# Altium PCB LCD_controller_hv2.PcbDoc
Units mm, origin at the board's own origin, x right, y up, seen from the top; angles counter-clockwise.
Board outline 172.5 x 79.9 mm, 2 copper layers (Top Layer, Bottom Layer); 40 components, 75 nets, 282 pads, 255 vias.
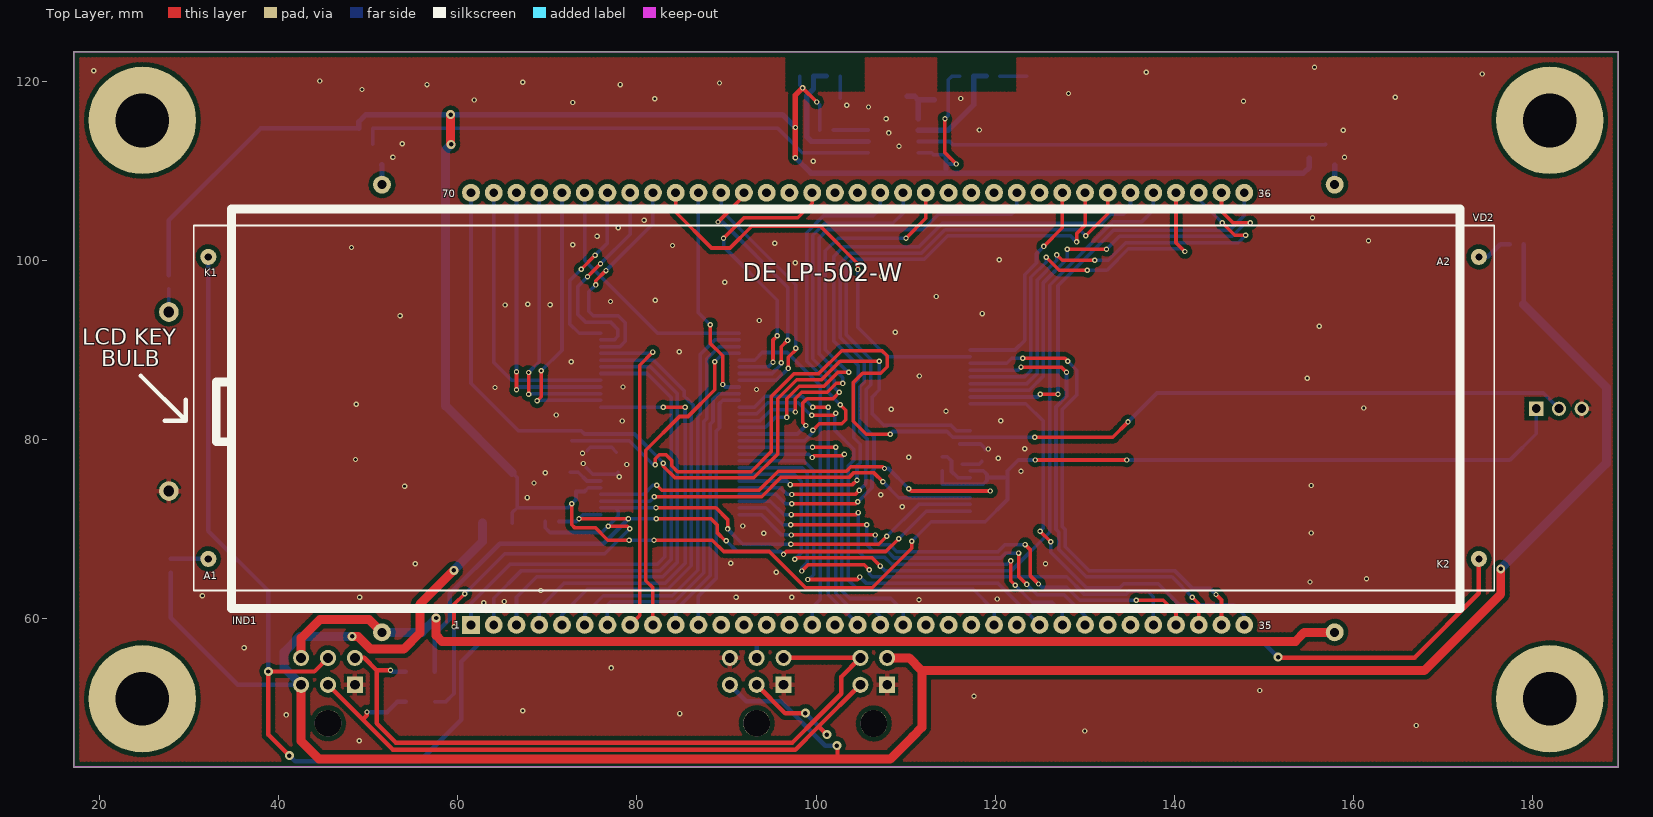
[diagram p0: Top Layer view]
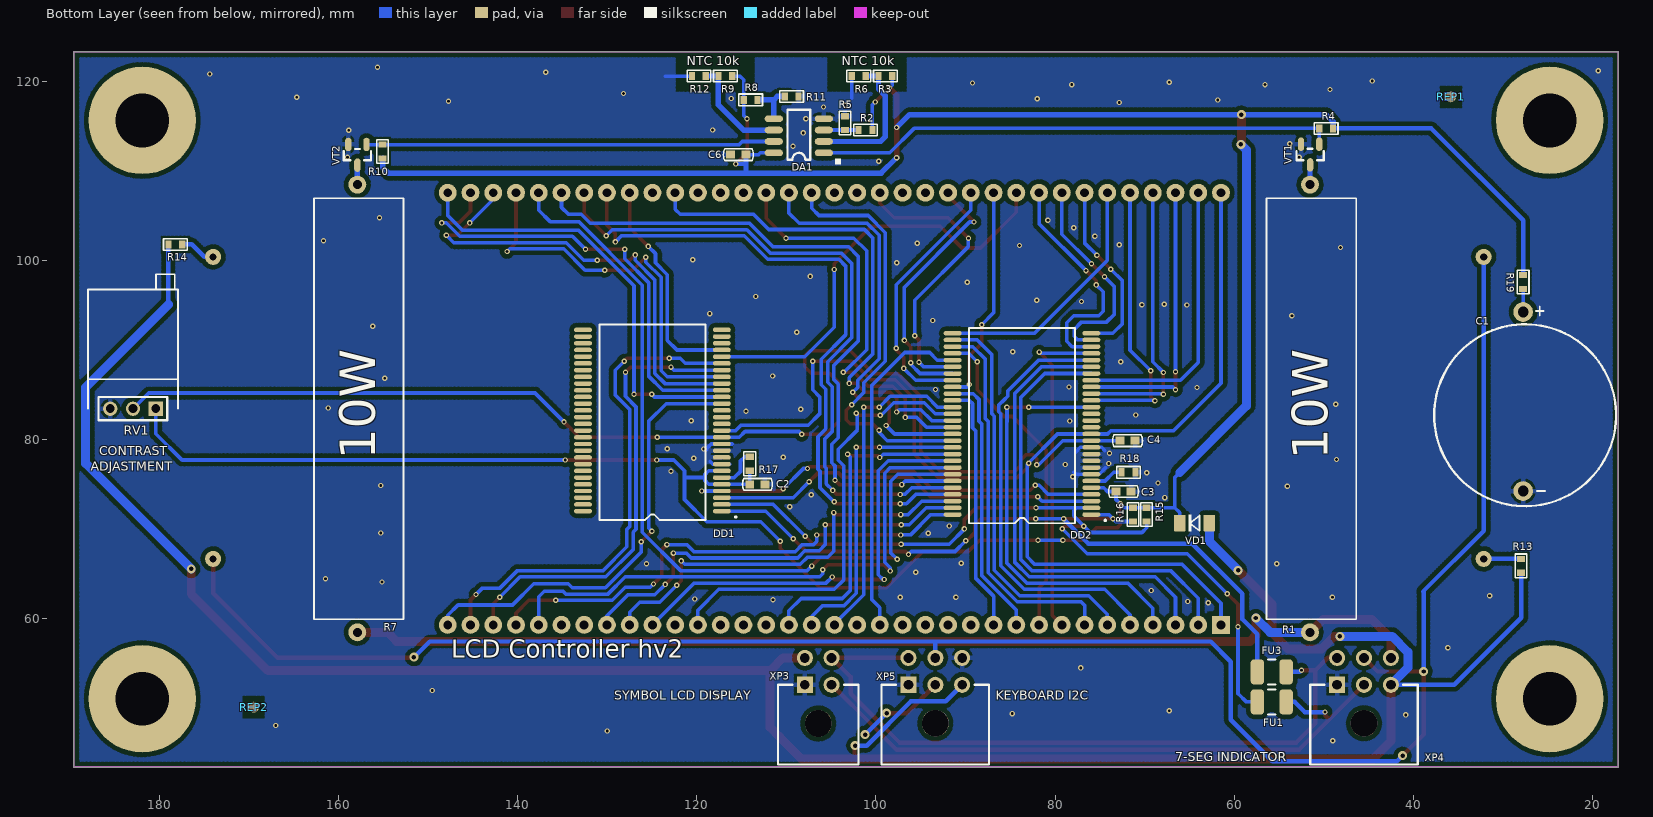
[diagram p1: Bottom Layer view, seen from below]

## Layer stack, top to bottom
Top Solder: solder mask 0.0102, Solder Resist, Dk 3.5
Top Layer: signal copper 0.0356
Dielectric 1: dielectric 0.32, FR-4, Dk 4.8
Bottom Layer: signal copper 0.0356
Bottom Solder: solder mask 0.0102, Solder Resist, Dk 3.5

## Board outline
17.1,43.419 189.6,43.419 189.6,123.319 17.1,123.319

## Design rules (kind name [scope] priority, off if disabled: settings)
Clearance Clearance_2 [InPolygon] p1: gap=0.5 ignorepadtopadclearanceinfootprint=FALSE
Clearance [All] p2: gap=0.2 ignorepadtopadclearanceinfootprint=FALSE
HoleSize [All] p1: absolutevalues=TRUE maxlimit=10 minlimit=0.025 maxpercent=80.000 minpercent=20.000
HoleToHoleClearance [All] p1: gap=0.2 allowstackedmicrovias=TRUE
MinimumSolderMaskSliver [All] p1: minsoldermaskwidth=0.05
PolygonConnect PolygonConnect_1 [IsVia] p1: connectstyle=Direct reliefconductorwidth=0.254 reliefentries=4 polygonreliefangle="90 Angle" airgapwidth=0.254
PolygonConnect PolygonConnect_2 [All] p2: connectstyle=Relief reliefconductorwidth=0.5 reliefentries=4 polygonreliefangle="90 Angle" airgapwidth=0.3
PolygonConnect [All] p3: connectstyle=Relief reliefconductorwidth=0.3 reliefentries=4 polygonreliefangle="90 Angle" airgapwidth=0.3
RoutingCorners [All] p1: cornerstyle=45-Degree minsetback=2 maxsetback=5
RoutingVias [All] p1: holewidth=0.4 width=0.8 viastyle="Through Hole" minholewidth=0.3 minwidth=0.6 maxholewidth=0.5 maxwidth=1
SilkToSilkClearance [All] p1: silktosilkclearance=0.1
SilkToSolderMaskClearance [IsPad] p1: minsilkscreentomaskgap=0.1 clearancetoexposedcopper=TRUE
SolderMaskExpansion [All] p1: expansion=0.102
Width [All] p1: maxlimit=5 minlimit=0.2 preferedwidth=0.4
24 further rules are at their usual default settings.

## Classes and differential pairs
component class Main: C2 C3 C4 DD1 DD2 R15 R16 R17 R18 REP1 REP2 RV1
component class LCD: IND1 R13 R14 VD2
component class Heater: C6 DA1 R1 R2 R3 R4 R5 R6 R7 R8 R9 R10 R11 R12 VT1 VT2
component class Connections: C1 FU1 FU3 R19 VD1 XP3 XP4 XP5

## Components (designator, comment, footprint, x,y, rotation, side; value= is the part's Value field where it differs from the comment)
C1 "EEC-S5R5H105" CR2032_ONBOARD 27.375,82.825 r180 bottom
C2 "0.1uF" CC0603 113.25,75 r180 bottom
C3 "0.1uF" CC0603 72.35,74.2 r180 bottom
C4 "0.1uF" CC0603 71.9,79.875 r180 bottom
C6 "0.1uF" CC0603 115.375,111.825 r0 bottom
DA1 "LM358D" SO-8 105.825,112.025 r90 bottom
DD1 "PCF8576C" SOT190-1 117.221,72.009 r0 bottom locked
DD2 "PCF8576C" SOT190-1 75.946,71.628 r0 bottom locked
FU1 "MICROSMD010F-2" RC1210 55.8,50.7 r0 bottom
FU3 "MICROSMD010F-2" RC1210 55.8,54.05 r0 bottom
IND1 "DE156" IND_DE156 61.468,59.309 r90 top locked
R1 "PRW 10W 47E" R_5W_Cement 51.525,108.475 r270 bottom
R2 "18k 1%" RC0603#1 101.175,114.575 r180 bottom
R3 "NCP18XH103J03RB" RC0603#1 98.95,120.6 r180 bottom
R4 "n.p" RC0603#1 49.725,114.75 r180 bottom
R5 "10k 1%" RC0603#1 103.475,115.35 r270 bottom
R6 "10k 1%" RC0603#1 101.925,120.6 r180 bottom
R7 "PRW 10W 47E" R_5W_Cement 157.925,108.475 r270 bottom
R8 "22k 1%" RC0603#1 114,117.95 r0 bottom
R9 "NCP18XH103J03RB" RC0603#1 116.825,120.6 r180 bottom
R10 "n.p" RC0603#1 155.1,112.175 r270 bottom
R11 "10k 1%" RC0603#1 109.425,118.325 r0 bottom
R12 "10k 1%" RC0603#1 119.775,120.6 r180 bottom
R13 "68E" RC0603#1 27.95,65.9 r90 bottom
R14 "68E" RC0603#1 178.25,101.8 r0 bottom
R15 "n.p" RC0603#1 69.775,71.625 r90 bottom
R16 "n.p" RC0603#1 71.3,71.625 r90 bottom
R17 "0E" RC0603#1 114.1,77.3 r90 bottom
R18 "0E" RC0603#1 71.8,76.35 r0 bottom
R19 "0E" RC0603#2 27.725,97.6 r270 bottom value=10E
REP1 "REPER_POINT_1.2" REPER1.2 35.8,118.275 r90 bottom
REP2 "REPER_POINT_1.2" REPER1.2 169.5,50.125 r90 bottom
RV1 "3296W-10K" PLS-03 180.44,83.45 r0 bottom
VD1 "LL4148" SOD-80 64.425,70.675 r180 bottom
VD2 "LP-502-W" LP-502-W 32.131,66.675 r0 top locked
VT1 "BC817-40" SOT-23(123) 50.5,113 r90 bottom
VT2 "BC817-40" SOT-23(123) 156.9,112.975 r90 bottom
XP3 "MIF2X02PRP" MIF2X02PRP 107.95,52.619 r270 bottom
XP4 "MIF2X03PRP" MIF2X03PRP#1 48.5,52.619 r270 bottom
XP5 "MIF2X03PRP" MIF2X03PRP#2 96.375,52.619 r270 bottom

## Footprints (in the part's own frame and the unit in brackets; to place one, negate y for a bottom-side part, rotate by r counter-clockwise, add the part's x,y. Pads: shape width x height; smd on the part's side, far side on the other; paste and mask are expansions set on the pad)
CC0603 [mm]
  rect 1x0.9 smd paste-25.4 mask+0.05: 1(-0.85,0) 2(0.85,0)
  silkscreen extent -1.66,-0.65 1.66,0.65
CR2032_ONBOARD [mm]
  round 2.2 hole 1.2 mask+0.05: 1(-0.35,-8.575) 2(-0.35,11.425)
  silkscreen extent -10.29,-10.26 10.03,12.03
IND_DE156 [mm]
  rect 2x2 hole 1 mask+0.05: 1(0,0)
  round 2 hole 1 mask+0.05: 2(0,-2.54) 3(0,-5.08) 4(0,-7.62) 5(0,-10.16) 6(0,-12.7) 7(0,-15.24) 8(0,-17.78) 9(0,-20.32) 10(0,-22.86) 11(0,-25.4) 12(0,-27.94) 13(0,-30.48) 14(0,-33.02) 15(0,-35.56) 16(0,-38.1) 17(0,-40.64) 18(0,-43.18) 19(0,-45.72) 20(0,-48.26) 21(0,-50.8) 22(0,-53.34) 23(0,-55.88) 24(0,-58.42) 25(0,-60.96) 26(0,-63.5) 27(0,-66.04) 28(0,-68.58) 29(0,-71.12) 30(0,-73.66) 31(0,-76.2) 32(0,-78.74) 33(0,-81.28) 34(0,-83.82) 35(0,-86.36) 36(48.26,-86.36) 37(48.26,-83.82) 38(48.26,-81.28) 39(48.26,-78.74) 40(48.26,-76.2) 41(48.26,-73.66) 42(48.26,-71.12) 43(48.26,-68.58) 44(48.26,-66.04) 45(48.26,-63.5) 46(48.26,-60.96) 47(48.26,-58.42) 48(48.26,-55.88) 49(48.26,-53.34) 50(48.26,-50.8) 51(48.26,-48.26) 52(48.26,-45.72) 53(48.26,-43.18) 54(48.26,-40.64) 55(48.26,-38.1) 56(48.26,-35.56) 57(48.26,-33.02) 58(48.26,-30.48) 59(48.26,-27.94) 60(48.26,-25.4) 61(48.26,-22.86) 62(48.26,-20.32) 63(48.26,-17.78) 64(48.26,-15.24) 65(48.26,-12.7) 66(48.26,-10.16) 67(48.26,-7.62) 68(48.26,-5.08) 69(48.26,-2.54) 70(48.26,0)
  silkscreen extent 1.83,-110.45 46.43,28.45
LP-502-W [mm]
  round 1.8 hole 0.8 mask+0.05: 1(0,0) 2(0,33.73) 3(141.9,0) 4(141.9,33.73)
  silkscreen extent -1.62,-3.53 143.63,37.23
MIF2X02PRP [mm]
  rect 1.8x1.8 hole 1.1 mask+0.05: 1(0,0)
  round 1.8 hole 1.1 mask+0.05: 2(0,3) 3(-3,0) 4(-3,3)
  round 3 hole 3 unplated mask+0.05: 5(4.32,1.5)
  silkscreen extent 0,-3 8.9,6
MIF2X03PRP#1 [mm]
  rect 1.8x1.8 hole 1.1 mask+0.05: 1(0,0)
  round 1.8 hole 1.1 mask+0.05: 2(0,3) 3(0,6) 4(-3,0) 5(-3,3) 6(-3,6)
  round 3 hole 3 unplated mask+0.05: 7(4.3,3)
  silkscreen extent 0,-3 8.9,9
MIF2X03PRP#2 [mm]
  rect 1.8x1.8 hole 1.1: 1(0,0)
  round 1.8 hole 1.1: 2(0,3) 3(0,6) 4(-3,0) 5(-3,3) 6(-3,6)
  round 3 hole 3 unplated: 7(4.3,3)
  silkscreen extent 0,-3 8.9,9
PLS-03 [mm]
  rect 1.6x1.6 hole 1: 1(0,0)
  round 1.6 hole 1: 2(2.54,0) 3(5.08,0)
  silkscreen extent -1.3,-1.3 6.4,1.3
R_5W_Cement [mm]
  round 2 hole 1 mask+0.05: 1(0,0) 2(50,0)
  silkscreen extent 1.52,-4.85 48.55,5.15
RC0603#1 [mm]
  rect 0.7x0.9 smd paste-25.4 mask+0.05: 1(-0.775,0) 2(0.774,0)
  silkscreen extent -1.33,-0.65 1.33,0.65
RC0603#2 [mm]
  rect 0.7x0.9 smd paste-25.4: 1(-0.775,0) 2(0.774,0)
  silkscreen extent -1.32,-0.65 1.33,0.65
RC1210 [mm]
  rrect50% 1.5x2.8 smd mask+0.05: 1(-1.6,0) 2(1.6,0)
  silkscreen extent -0.45,-1.4 0.45,1.4
REPER1.2 [mm]
  round 1.2 smd paste-25.4 mask-25.4: 1(0,0)
  Top Layer pour cut-out: -1.35,-1.325 1.325,-1.325 1.325,1.325 -1.35,1.325
SO-8 [mil]
  oval 29.53x80 smd mask+1.97: 1(0,0) 2(50,0) 3(100,0) 4(150,0) 5(150,220) 6(100,220) 7(50,220) 8(0,220)
  silkscreen extent -50,-75 190,160
SOD-80 [mm]
  rrect10% 1.3x1.83 smd paste-25.4 mask+0.05: 1(1.651,0) 2(-1.651,0)
  silkscreen extent -0.66,-0.91 0.56,0.91
SOT190-1 [mm]
  oval 2x0.5 smd mask+0.05: 1(0,0) 2(0,-0.75) 3(0,-1.5) 4(0,-2.25) 5(0,-3) 6(0,-3.75) 7(0,-4.5) 8(0,-5.25) 9(0,-6) 10(0,-6.75) 11(0,-7.5) 12(0,-8.25) 13(0,-9) 14(0,-9.75) 15(0,-10.5) 16(0,-11.25) 17(0,-12) 18(0,-12.75) 19(0,-13.5) 20(0,-14.25) 21(0,-15) 22(0,-15.75) 23(0,-16.5) 24(0,-17.25) 25(0,-18) 26(0,-18.75) 27(0,-19.5) 28(0,-20.25) 29(15.5,-20.25) 30(15.5,-19.5) 31(15.5,-18.75) 32(15.5,-18) 33(15.5,-17.25) 34(15.5,-16.5) 35(15.5,-15.75) 36(15.5,-15) 37(15.5,-14.25) 38(15.5,-13.5) 39(15.5,-12.75) 40(15.5,-12) 41(15.5,-11.25) 42(15.5,-10.5) 43(15.5,-9.75) 44(15.5,-9) 45(15.5,-8.25) 46(15.5,-7.5) 47(15.5,-6.75) 48(15.5,-6) 49(15.5,-5.25) 50(15.5,-4.5) 51(15.5,-3.75) 52(15.5,-3) 53(15.5,-2.25) 54(15.5,-1.5) 55(15.5,-0.75) 56(15.5,0)
  silkscreen extent -1.64,-20.85 13.66,0.98
SOT-23(123) [mil]
  oval 59.06x28.07 smd mask+1.97: 1(-0.5,0) 2(-0.5,80) 3(-91.5,40)
  silkscreen extent -70,-20 -20,100

## Part data
C1: library part CR2032-VBY2
C2 C3 C4 C6: library part CC0603, "CC0603"
DD1 DD2: library part PCF8576, "LCD Controller"
FU1 FU3: library part MICROSMD, "MICROSMD"
IND1: library part IND7_DE156, "6digit 7Segment indicator"
R1 R7: library part R_10W
R2 R3 R4 R5 R6 R8 R9 R10 R11 R12 R13 R14 R15 R16 R17 R18 R19: library part RC0603, "RC0603"
REP1 REP2: library part REPER1.2, "REPER1.2"
RV1: library part PLS03
VD2: "Backlight for lcd display"
VT1 VT2: library part BC846BLT1, "NPN 500ma transistor", ComponentField7="Published 29-Sep-2000", OriginalName=BC846BLT1

## Free pads (board coordinates)
  round 12 hole 6 unplated mask+0.05: 0(24.765,51.054) 0(24.765,115.644) 0(181.95,51.054) 0(181.95,115.644)

## Via types
v1: diameter 0.6, hole 0.3, Top Layer to Bottom Layer, tented both sides, 243 vias
v2: diameter 1, hole 0.5, Top Layer to Bottom Layer, tented both sides, 12 vias

## Nets (pads, with @x,y where several pads share a name; then routed paths per layer and width w, separated by ;. In a path a pad name is that pad's centre, name@x,y a point inside that pad or via, vN(x,y) a via of type N, cw(c..) or ccw(c..) an arc to the next point about the centre after c; other vN are vias at no path point)
1A: DD2.19 IND1.67 | length 31.1
  Top Layer w0.4: v1(67.9,85.075) v1(67.9,87.5)
  Bottom Layer w0.4: v1(67.9,85.075) 67.953,85.128 DD2.19 ; v1(67.9,87.5) 69.088,88.688 IND1.67
1B: DD2.18 IND1.66 | length 31.4
  Top Layer w0.4: v1(68.85,84.325) 69.325,84.8 v1(69.325,87.675)
  Bottom Layer w0.4: v1@68.903,84.378 DD2.18 ; v1(69.325,87.675) 71.628,89.978 IND1.66
1C: DD2.17 IND1.4 | length 47.1
  Top Layer w0.4: v1(82.928,83.628) v1(85.378,83.628)
  Bottom Layer w0.4: IND1.4 69.088,61.163 71.9,63.975 83.17,63.975 85.378,66.183 85.378,82.017 85.37,82.025 85.37,83.62 v1(85.378,83.628) ; DD2.17 v1(82.928,83.628)
1D: DD2.23 IND1.3 | length 51.3
  Bottom Layer w0.4: IND1.3 66.548,62.398 68.825,64.675 82.88,64.675 84.525,66.32 84.525,85.125 81.522,88.128 DD2.23
1E: DD2.22 IND1.2 | length 51.7
  Bottom Layer w0.4: IND1.2 64.008,62.283 67.1,65.375 82.59,65.375 83.825,66.61 83.825,84.7 81.147,87.378 DD2.22
1F: DD2.20 IND1.68 | length 31.5
  Top Layer w0.4: v1(66.55,85.575) v1(66.55,87.575)
  Bottom Layer w0.4: IND1.68 66.548,87.577 v1(66.55,87.575) ; v1(66.55,85.575) 66.853,85.878 DD2.20
1G: DD2.21 IND1.69 | length 31.7
  Bottom Layer w0.4: IND1.69 64.008,88.617 65.997,86.628 DD2.21
2A: DD2.27 IND1.63 | length 24.1
  Top Layer w0.4: v1(74.475,98.175) v1(75.925,99.625)
  Bottom Layer w0.4: v1(74.475,98.175) 73.4,97.1 73.4,93.975 74.25,93.125 77.05,93.125 77.875,92.3 77.875,91.525 77.478,91.128 DD2.27 ; v1(75.925,99.625) 79.248,102.948 IND1.63
2B: DD2.26 IND1.62 | length 25.9
  Top Layer w0.4: v1(75.4,97.275) 75.4,97.725 v1(76.55,98.875)
  Bottom Layer w0.4: v1(75.4,97.275) 74.625,96.5 74.625,94.325 75.125,93.825 77.925,93.825 78.7,93.05 78.7,90.975 78.103,90.378 DD2.26 ; v1(76.55,98.875) 81.788,104.113 IND1.62
2C: DD2.25 IND1.8 | length 37.4
  Top Layer w0.4: IND1.8 80.3,60.361 80.3,88.3 v1(81.775,89.775)
  Bottom Layer w0.4: DD2.25 81.628,89.628 v1(81.775,89.775)
2D: DD2.31 IND1.7 | length 42.7
  Bottom Layer w0.4: IND1.7 76.708,61.483 77.1,61.875 84.24,61.875 87.478,65.113 87.478,82.028 87.8,82.35 87.8,89 89.178,90.378 DD2.31
2E: DD2.30 IND1.6 | length 45.1
  Bottom Layer w0.4: IND1.6 74.168,60.493 76.25,62.575 83.95,62.575 86.778,65.403 86.778,82.613 87.05,82.885 87.05,89.475 88.703,91.128 DD2.30
2F: DD2.28 IND1.64 | length 20.3
  Top Layer w0.4: v1(73.775,99.025) v1(75.325,100.575)
  Bottom Layer w0.4: v1(73.775,99.025) 72.475,97.725 72.475,92.95 73.547,91.878 DD2.28 ; v1(75.325,100.575) 76.708,101.958 IND1.64
2G: DD2.29 IND1.65 | length 28.2
  Bottom Layer w0.4: IND1.65 74.168,100.007 82.297,91.878 DD2.29
3A: DD2.35 IND1.58 | length 29.3
  Top Layer w0.4: v1(89.05,104.3) 91.948,107.198 IND1.58 ; v1(96.105,88.579) 96.105,90.355 v1(96.825,91.075)
  Bottom Layer w0.4: v1(89.05,104.3) 89.55,104.3 96.825,97.025 v1(96.825,91.075) ; DD2.35 95.084,87.378 96.105,88.398 v1(96.105,88.579)
3B: DD2.34 IND1.55 | length 33.2
  Top Layer w0.4: v1(89.675,102.5) 91.95,104.775 97.95,104.775 99.568,106.393 IND1.55 ; v1(95.2,88.625) 95.2,91.125 v1(95.675,91.6)
  Bottom Layer w0.4: v1(89.675,102.5) 89.675,101.575 95.675,95.575 v1(95.675,91.6) ; DD2.34 94.703,88.128 v1(95.2,88.625)
3C: DD2.33 IND1.16 | length 38
  Bottom Layer w0.4: DD2.33 93.153,88.878 94,89.725 96.806,89.725 100.455,86.077 100.455,62.13 99.568,61.243 IND1.16
3D: DD2.39 IND1.11 | length 28.1
  Bottom Layer w0.4: IND1.11 86.868,62.523 88.878,64.533 88.878,80.978 89.225,81.325 89.225,84.025 89.578,84.378 DD2.39
3E: DD2.38 IND1.10 | length 30.1
  Bottom Layer w0.4: IND1.10 84.328,60.973 88.178,64.823 88.178,81.738 88.5,82.06 88.5,84.475 89.153,85.128 90.125,85.128 DD2.38
3F: DD2.36 IND1.59 | length 29.6
  Top Layer w0.4: v1(96.9,87.95) 96.905,87.955 96.905,89.18 97.825,90.1 v1(97.725,90.2)
  Bottom Layer w0.4: IND1.59 89.408,105.617 97.725,97.3 v1(97.725,90.2) ; DD2.36 95.578,86.628 v1(96.9,87.95) v1@96.975,87.95
3G: DD2.37 IND1.60 | length 24.5
  Top Layer w0.4: v1(88.2,92.825) 88.2,90.725 89.575,89.35 v1(89.575,86.15)
  Bottom Layer w0.4: IND1.60 86.868,94.157 v1(88.2,92.825) ; v1(89.575,86.15) 89.847,85.878 DD2.37
4A: DD2.43 IND1.50 | length 46.2
  Top Layer w0.4: v1(96.725,82.475) 96.725,84.565 98.135,85.975 100.9,85.975 102.45,87.525 v1(103.65,87.525) ; v1(110.05,102.5) 112.268,104.718 IND1.50
  Bottom Layer w0.4: DD2.43 94.353,81.378 95.45,82.475 v1(96.725,82.475) ; v1(103.65,87.525) 103.575,87.525 101.05,90.05 101.05,101.075 102.475,102.5 v1(110.05,102.5)
4B: DD2.42 IND1.46 | length 56.9
  Top Layer w0.4: v1(97.7,83.075) 97.7,84.55 98.425,85.275 101.25,85.275 102.25,86.275 v1(102.975,86.275)
  Bottom Layer w0.4: DD2.42 93.778,82.128 95,83.35 97.425,83.35 v1(97.7,83.075) ; v1(102.975,86.275) 102.975,86.925 100.35,89.55 100.35,102.52 101.29,103.46 111.985,103.46 113.675,105.15 121.875,105.15 122.428,105.703 IND1.46
4C: DD2.41 IND1.24 | length 51.1
  Top Layer w0.4: v1(99.53,82.704) 101.979,82.704 v1(102.2,82.925)
  Bottom Layer w0.4: DD2.41 93.368,82.878 94.615,84.125 98,84.125 99.421,82.704 v1(99.53,82.704) ; v1(102.2,82.925) 102.072,82.797 102.072,81.078 104.225,78.925 104.225,77.7 103.597,77.072 103.597,64.328 104.65,63.275 117.55,63.275 119.888,60.937 IND1.24
4D: DD2.47 IND1.20 | length 36.7
  Top Layer w0.4: v1(99.575,78) 99.75,78.175 102.975,78.175 v1(103.175,78.375)
  Bottom Layer w0.4: DD2.47 99.197,78.378 v1(99.575,78) ; v1(103.175,78.375) 102.897,78.097 102.897,63.133 103.78,62.25 108.35,62.25 109.728,60.872 IND1.20
4E: DD2.46 IND1.19 | length 34
  Top Layer w0.4: v1(99.603,79.128) v1(102.197,79.128)
  Bottom Layer w0.4: DD2.46 v1(99.603,79.128) ; v1(102.197,79.128) 102.197,62.843 103.615,61.425 106,61.425 107.188,60.237 IND1.19
4F: DD2.44 IND1.51 | length 47.2
  Top Layer w0.4: v1(98.875,81.575) 98.5,81.95 98.5,84.075 99,84.575 101.9,84.575 v1(102.6,85.275)
  Bottom Layer w0.4: DD2.44 97.928,80.628 v1(98.875,81.575) ; v1(102.6,85.275) 102.05,85.825 102.05,86.64 99.65,89.04 99.65,102.81 101,104.16 108.585,104.16 109.728,105.303 IND1.51
4G: DD2.45 IND1.52 | length 46.8
  Top Layer w0.4: v1(99.655,81.054) 100.376,81.775 102.875,81.775 103.325,82.225 103.325,83.275 v1(102.7,83.9)
  Bottom Layer w0.4: DD2.45 98.728,79.878 99.655,80.805 v1(99.655,81.054) ; v1(102.7,83.9) 101.35,85.25 101.35,86.35 98.95,88.75 98.95,103.1 100.875,105.025 106.375,105.025 107.188,105.838 IND1.52
5A: DD2.51 IND1.41 | length 77.3
  Top Layer w0.4: v1(97.125,74.975) 104.075,74.975 v1(104.575,75.475)
  Bottom Layer w0.4: DD2.51 96.722,75.378 v1(97.125,74.975) ; v1(104.575,75.475) 104.575,77.06 104.925,77.41 104.925,79.475 104.2,80.2 104.2,86.2 104.7,86.7 104.7,88.3 102,91 102,100.475 103.05,101.525 111.5,101.525 114.125,104.15 131.925,104.15 132.925,105.15 134.35,105.15 135.128,105.928 IND1.41
5B: DD2.50 IND1.40 | length 91.7
  Top Layer w0.4: v1(97.625,66.625) 97.8,66.8 106.25,66.8 v1(107.175,65.875)
  Bottom Layer w0.4: DD2.50 97.572,76.128 98.335,75.365 98.335,67.335 v1(97.625,66.625) ; v1(107.175,65.875) 107.675,65.375 121.825,65.375 126.1,69.65 126.1,97.25 133.2,104.35 136.4,104.35 137.668,105.618 IND1.40
5C: DD2.49 IND1.31 | length 63.7
  Top Layer w0.4: v1(98.4,65.325) 99.1,66.025 105.375,66.025 v1(105.95,65.45)
  Bottom Layer w0.4: DD2.49 98.407,76.878 99.035,76.25 99.035,66.31 98.4,65.675 v1(98.4,65.325) ; v1(105.95,65.45) 105.95,65 106.275,64.675 128,64.675 129.925,62.75 134.65,62.75 134.95,63.05 137.05,63.05 137.668,62.432 IND1.31
5D: DD2.55 IND1.28 | length 47.9
  Top Layer w0.4: v1(97.175,70.475) v1(105.65,70.475) ; v1(122.625,67.325) 122.625,64.75 v1(123.55,63.825)
  Bottom Layer w0.4: DD2.55 94.397,72.378 96.3,70.475 v1(97.175,70.475) ; v1(105.65,70.475) 105.65,68.275 106.35,67.575 107.94,67.575 108.74,66.775 120.625,66.775 121.175,67.325 v1(122.625,67.325) ; v1(123.55,63.825) 124.7,62.675 127.7,62.675 130.048,60.327 IND1.28
5E: DD2.54 IND1.27 | length 46.9
  Top Layer w0.4: v1(97.25,71.625) 104.5,71.625 v1(104.725,71.85) ; v1(121.75,66.45) 121.75,64.25 v1(122.25,63.75)
  Bottom Layer w0.4: DD2.54 94.897,73.128 96.4,71.625 v1(97.25,71.625) ; v1(104.725,71.85) 104.725,67.525 105.375,66.875 107.65,66.875 108.45,66.075 121.375,66.075 v1(121.75,66.45) ; v1(122.25,63.75) 124.15,61.85 126.375,61.85 127.508,60.717 IND1.27
5F: DD2.52 IND1.42 | length 76.3
  Top Layer w0.4: v1(97.3,73.875) 104.375,73.875 v1(104.825,74.325) ; v1(130.125,102.775) 132.588,105.238 IND1.42
  Bottom Layer w0.4: DD2.52 96.022,74.628 96.775,73.875 v1(97.3,73.875) ; v1(104.825,74.325) 105.55,75.05 105.55,76.775 105.725,76.95 105.725,80.075 104.9,80.9 104.9,85.91 105.4,86.41 105.4,88.7 102.7,91.4 102.7,99.675 103.85,100.825 111.79,100.825 114.415,103.45 129.45,103.45 v1(130.125,102.775)
5G: DD2.53 IND1.43 | length 75.8
  Top Layer w0.4: v1(97.3,72.825) 104.45,72.825 v1(104.675,73.05) ; v1(129.1,102.075) 129.1,102.975 130.048,103.923 IND1.43
  Bottom Layer w0.4: DD2.53 95.547,73.878 96.6,72.825 v1(97.3,72.825) ; v1(104.675,73.05) 104.681,73.05 106.25,74.619 106.25,76.475 106.475,76.7 106.475,80.315 105.6,81.19 105.6,85.62 106.1,86.12 106.1,88.99 103.4,91.69 103.4,99.385 104.14,100.125 112.08,100.125 114.705,102.75 128.425,102.75 v1(129.1,102.075)
6A: DD1.19 IND1.37 | length 51.6
  Top Layer w0.4: v1(128.05,101.25) v1(132.45,101.25) ; IND1.37 145.288,105.487 146.575,104.2 v1(148.5,104.2)
  Bottom Layer w0.4: DD1.19 123.809,85.509 125.4,87.1 125.4,97.54 128.05,100.19 v1(128.05,101.25) ; v1(132.45,101.25) 133.9,102.7 146.49,102.7 147.99,104.2 v1(148.5,104.2)
6B: DD1.18 IND1.36 | length 48.6
  Top Layer w0.4: v1(125.05,85.075) v1(127.025,85.075)
  Bottom Layer w0.4: DD1.18 124.734,84.759 v1(125.05,85.075) ; v1(127.025,85.075) 127.025,97.185 133.24,103.4 146.2,103.4 147.828,105.028 IND1.36
6C: DD1.17 IND1.35 | length 50.2
  Top Layer w0.4: v1(125.025,69.775) v1(126.225,68.575)
  Bottom Layer w0.4: DD1.17 123.441,84.009 125.4,82.05 125.4,70.15 v1(125.025,69.775) ; v1(126.225,68.575) 126.225,67.44 130.215,63.45 133.925,63.45 134.375,63.9 138.225,63.9 140.6,61.525 146.675,61.525 147.828,60.372 IND1.35
6D: DD1.23 IND1.34 | length 55.9
  Top Layer w0.4: v1(123.075,89.075) 127.8,89.075 v1(128.125,88.75) ; v1(144.675,62.7) 145.288,62.087 IND1.34
  Bottom Layer w0.4: DD1.23 121.309,88.509 121.875,89.075 v1(123.075,89.075) ; v1(128.125,88.75) 129.125,87.75 129.125,84.985 127.5,83.36 127.5,70.29 127.825,69.965 127.825,68.015 130.465,65.375 140.04,65.375 142.04,63.375 144,63.375 v1(144.675,62.7)
6E: DD1.22 IND1.33 | length 52.1
  Top Layer w0.4: v1(122.9,88.1) 127.4,88.1 v1(127.975,87.525) ; v1(142.025,62.4) 142.748,61.677 IND1.33
  Bottom Layer w0.4: DD1.22 122.559,87.759 v1(122.9,88.1) ; v1(127.975,87.525) 127.975,84.825 126.8,83.65 126.8,70 127.125,69.675 127.125,67.725 130.175,64.675 139.75,64.675 v1(142.025,62.4)
6F: DD1.20 IND1.38 | length 52.2
  Top Layer w0.4: v1(126.9,100.625) 127.5,100.025 v1(131.125,100.025) ; v1(145.375,104.2) 146.75,102.825 v1(147.975,102.825)
  Bottom Layer w0.4: DD1.20 123.569,86.259 124.7,87.39 124.7,97.83 126.9,100.03 v1(126.9,100.625) ; v1(131.125,100.025) 132.625,100.025 134.6,102 147.15,102 v1(147.975,102.825) ; IND1.38 142.748,106.827 v1(145.375,104.2)
6G: DD1.21 IND1.39 | length 44.7
  Top Layer w0.4: v1(125.7,100.375) 127.175,98.9 v1(130.3,98.9) ; IND1.39 140.208,101.992 v1(141.2,101)
  Bottom Layer w0.4: DD1.21 123.329,87.009 124,87.68 124,98.12 125.7,99.82 v1(125.7,100.375) ; v1(130.3,98.9) 132.49,98.9 134.89,101.3 140.9,101.3 v1(141.2,101)
+5V: C2.1 C3.1 C6.1 DA1.8 DD1.5 DD1.7 DD2.5 R2.2 R3.2 R4.2 R8.2 R9.2 R10.2 R15.2 R16.2 R17.1 R19.1 RV1.1 VD1.2 | length 371.6
  Top Layer w0.4: v1(72.725,72.825) 72.725,70.475 73.025,70.175 75.35,70.175 76.75,68.775 v1(79.125,68.775) ; v1(81.9,68.775) 88.425,68.775 89.7,67.5 94.775,67.5 98.825,63.45 106.275,63.45 110.7,67.875 v1(110.7,68.65) ; v1(98.5,119.275) v1(100.075,117.7) ; v1(114.4,115.825) 114.4,112.05 v1(115.675,110.775) ; v1(124.475,77.725) v1(134.7,77.725)
  Top Layer w0.6: v1(97.7,111.475) v1(97.7,114.85) 97.7,118.475 v1(98.5,119.275)
  Top Layer w1: v2(59.2,116.3) 59.2,113.025 v2(59.25,112.975)
  Bottom Layer w0.4: VD1.2 66.076,71.851 66.624,72.399 ; 66.076,76.324 66.624,75.776 66.624,72.399 ; DD2.5 74.578,74.628 74.15,74.2 C3.1 73.2,73.3 v1(72.725,72.825) 72.299,72.399 R16.2 R15.2 66.624,72.399 ; v1(79.125,68.775) v1(81.9,68.775) ; R3.2 98.176,119.599 v1(98.5,119.275) ; v1(100.075,117.7) 100.401,117.374 R2.2 ; v1(110.7,68.65) 112.875,70.825 118.9,70.825 121.384,73.309 121.384,75.75 ; DA1.8 112.925,112.025 113.125,111.825 C6.1 ; R17.1 C2.1 114.109,75.009 DD1.5 118.684,75.009 119.1,75.425 119.1,75.763 ; v1(114.4,115.825) 114.774,116.199 R8.2 114.774,120.174 115.2,120.6 R9.2 ; 114.525,110.775 v1(115.675,110.775) ; DD1.7 118.691,76.509 119.1,76.1 119.1,75.763 ; v1(124.475,77.725) 122.6,77.725 121.384,76.509 121.384,75.75 ; v1(134.7,77.725) 177.5,77.725 180.44,80.665 RV1.1 ; 119.1,75.763 121.372,75.763 121.384,75.75
  Bottom Layer w0.5: R19.1 27.725,104.5 37.975,114.75 R4.2
  Bottom Layer w0.6: R4.2 48.951,115.501 49.75,116.3 v2(59.2,116.3) 96.25,116.3 v1(97.7,114.85) ; v1(97.7,111.475) 99.425,109.75 114.525,109.75 ; C6.1 114.525,110.775 114.525,109.75 ; R10.2 155.1,110.4 154.45,109.75 114.525,109.75
  Bottom Layer w1: v2(59.25,112.975) 58.625,112.35 58.625,83.775 66.076,76.324
+12V: R1.2 R7.2 XP4.6 | length 122.4
  Top Layer w1: XP4.6 42.5,57.825 44.575,59.9 50.1,59.9 R1.2 ; v2(57.575,60.075) 57.575,58.125 58.225,57.475 61,57.475 153.55,57.475 154.55,58.475 R7.2
  Bottom Layer w1: R1.2 55.975,58.475 v2(57.575,60.075)
BL: VD2.2 VD2.3 XP4.5 XP5.5 | length 218.7
  Top Layer w0.5: v2(41.191,44.7) 38.85,47.041 v2(38.85,54.1) 43.981,54.1 XP4.5 ; v2(151.6,55.7) 151.65,55.65 166.85,55.65 174.031,62.831 VD2.3
  Bottom Layer w0.5: VD2.2 32.131,69.794 38.9,63.025 38.85,62.975 v2(38.85,54.1) ; v2(41.191,44.7) 41.822,44.069 55.744,44.069 60.375,48.7 60.375,55.2 62.625,57.45 93.475,57.45 ; XP5.5 93.375,57.35 93.475,57.45 ; v2(151.6,55.7) 149.85,57.45 93.475,57.45
BP: DD1.13 DD2.13 IND1.1 IND1.70 | length 135.1
  Top Layer w0.4: v1(82.95,77.375) 82.95,77.025 84.25,75.725 93.055,75.725 95.725,78.395 95.725,84.555 97.845,86.675 100.61,86.675 102.685,88.75 v1(107.075,88.75)
  Bottom Layer w0.4: IND1.1 61.468,61.718 65.825,66.075 82.3,66.075 83.125,66.9 83.125,77.231 79.728,80.628 DD2.13 74.147,80.628 73.775,81 66.775,81 61.468,86.307 IND1.70 ; v1(107.075,88.75) 107.075,85.575 106.3,84.8 106.3,82.85 107.55,81.6 115.075,81.6 115.666,81.009 DD1.13
COL1: DD1.24 IND1.61 | length 47.9
  Top Layer w0.4: IND1.61 84.328,105.397 88.325,101.4 90.4,101.4 92.825,103.825 100.5,103.825 104.675,99.65 v1(104.675,99)
  Bottom Layer w0.4: v1(104.675,99) 104.675,92.55 107.966,89.259 DD1.24
COL2: DD1.25 IND1.44 | length 24.8
  Top Layer w0.4: v1(125.425,101.575) 127.508,103.658 IND1.44
  Bottom Layer w0.4: DD1.25 122.234,90.009 123.3,91.075 123.3,98.41 124.625,99.735 124.625,100.775 v1(125.425,101.575)
DP: DD2.24 IND1.5 | length 48.7
  Bottom Layer w0.4: IND1.5 71.628,60.453 74.45,63.275 83.46,63.275 86.078,65.893 86.078,82.307 86.07,82.315 86.07,82.895 86.275,83.1 86.275,83.862 85.709,84.428 85.697,84.428 85.3,84.825 85.3,85.425 81.847,88.878 DD2.24
DP2: DD2.32 IND1.9 | length 36.6
  Top Layer w0.4: IND1.9 81.788,63.448 81,64.236 81,78.825 84.75,82.575 85.7,82.575 88.7,85.575 v1(88.7,88.7)
  Bottom Layer w0.4: v1(88.7,88.7) 89.628,89.628 DD2.32
DP3: DD2.40 IND1.18 | length 36.6
  Top Layer w0.4: v1(99.628,83.628) v1(101.372,83.628)
  Bottom Layer w0.4: DD2.40 93.128,83.628 94.325,84.825 98.431,84.825 v1(99.628,83.628) ; v1(101.372,83.628) 101.372,62.678 104.648,59.402 IND1.18
DP4: DD2.48 IND1.26 | length 49.5
  Top Layer w0.4: v1(99.075,64.375) 104.625,64.375 v1(104.9,64.65)
  Bottom Layer w0.4: DD2.48 98.647,77.628 99.75,76.525 99.75,64.9 99.225,64.375 v1(99.075,64.375) ; v1(104.9,64.65) 105.575,63.975 120.302,63.975 IND1.26
DP5: DD2.56 IND1.32 | length 57.4
  Top Layer w0.4: v1(97.225,69.35) v1(106.6,69.35) ; v1(123.35,68.275) 123.95,67.675 123.95,64.775 v1(124.85,63.875) ; v1(135.775,62.05) 138.775,62.05 140.208,60.617 IND1.32
  Bottom Layer w0.4: DD2.56 93.872,71.628 96.15,69.35 v1(97.225,69.35) ; v1(106.6,69.35) 106.6,68.625 106.95,68.275 108.23,68.275 109.03,67.475 120.335,67.475 121.135,68.275 v1(123.35,68.275) ; v1(124.85,63.875) 125.225,63.5 128,63.5 129.45,62.05 v1(135.775,62.05)
GND: C1.1 C2.2 C3.2 C4.2 C6.2 DA1.4 DD1.8 DD1.9 DD1.10 DD1.11 DD2.7 DD2.8 DD2.9 DD2.10 DD2.11 R5.1 R6.1 R11.1 R12.1 R18.1 RV1.3 VT1.2 VT2.2 XP3.1 XP4.1 XP5.1 XP5.6 | length 18.6
  Bottom Layer w0.4: 74.325,76.875 75.072,76.128 DD2.7 77.653,76.128 77.9,76.375 ; 74.45,78.775 74.803,79.128 DD2.11 77.172,79.128 77.7,78.6 ; 102.7,118.15 R6.1 ; 116.034,79.509 DD1.11 118.391,79.509 118.9,79 118.9,78.85 ; DD1.8@116.326,77.259 DD1.8 118.21,77.259 118.5,77.55 ; R12.1 123.55,120.6
  other v1: 48.975,46.35 130,47.45 167.025,48.075 40.825,49.25 84.775,49.4 67.25,49.7 117.65,51.325 149.575,51.975 77.125,54.5 36.125,56.75 62.9,61.775 65.2,61.925 111.5,62.1 120.225,62.2 49.025,62.4 91.075,62.4 97.275,62.4 31.475,62.575 69.25,63.15 155.175,64.1 161.475,64.45 95.55,65.175 125.625,66.125 55.25,66.15 90.475,66.2 94.15,69.55 155.325,69.575 91.825,70.35 109.625,72.5 67.75,73.525 107.225,73.825 54.05,74.775 155.325,74.875 68.5,75.15 78.025,75.85 69.75,76.3 122.9,76.45 78.875,77.225 74,77.325 48.575,77.775 120.35,77.9 110.35,78.025 73.925,78.475 119.25,78.95 123.3,78.992 78.35,82.075 120.65,82.1 71,82.75 114.525,83.15 108.4,83.375 161.175,83.525 48.65,83.95 93.35,85.6 64.15,85.825 78.45,85.875 154.875,86.85 111.55,87.1 72.65,88.7 84.725,89.8 108.85,91.975 156.2,92.65 93.675,93.3 53.55,93.825 118.575,94.075 65.275,95.025 70.3,95.05 67.8,95.1 77.05,95.425 82.05,95.575 113.425,95.975 89.825,97.575 107.35,98.225 97.675,99.75 120.45,100.075 48.125,101.45 83.975,101.675 72.85,101.775 95.4,101.925 161.7,102.2 75.55,102.725 77.9,103.65 80.8,104.5 155.45,104.775 99.7,111.1 52.75,111.55 159.025,111.55 109.275,112.775 53.775,113.025 108.125,114.25 158.9,114.55 118.25,114.575 107.825,115.85 105.857,117.15 103.45,117.35 72.825,117.65 147.75,117.775 61.825,117.925 82,118.075 116.175,118.1 164.7,118.225 128.2,118.65 49.3,119.1 56.55,119.65 78.125,119.65 89.225,119.825 67.25,119.9 44.575,120.05 174.4,120.825 136.9,121.025 19.325,121.2 155.675,121.575
NetC1_2: C1.2 R19.2 | length 2.6
  Bottom Layer w0.4: C1.2 R19.2
NetC4_1: C4.1 DD1.12 DD2.12 RV1.2 | length 140.4
  Top Layer w0.4: v1(82.05,77.175) 82.05,77.875 82.5,78.325 83.25,78.325 83.9,77.675 83.9,77.065 84.54,76.425 92.765,76.425 95.025,78.685 95.025,84.845 97.555,87.375 100.32,87.375 102.87,89.925 107.375,89.925 107.95,89.35 107.95,88.15 107.225,87.425 105.2,87.425 104.15,86.375 104.15,82.05 105.6,80.6 v1(108.3,80.6) ; v1(124.425,80.25) 133.125,80.25 v1(134.85,81.975)
  Bottom Layer w0.4: C4.1 72.753,79.878 DD2.12 79.132,79.878 81.835,77.175 v1(82.05,77.175) ; v1(108.3,80.6) 108.6,80.9 114.625,80.9 115.266,80.259 DD1.12 124.416,80.259 v1(124.425,80.25) ; v1(134.85,81.975) 138.075,85.2 181.23,85.2 RV1.2
NetDA1_1: DA1.1 R4.1 VT1.1 | length 58.2
  Bottom Layer w0.4: VT1.1 R4.1 95.75,114.75 98.475,112.025 DA1.1
NetDA1_2: DA1.2 R3.1 R6.2 | length 15.6
  Bottom Layer w0.6: R6.2 R3.1 99.725,119.175 98.975,118.425 98.975,113.8 99.48,113.295 DA1.2
NetDA1_3: DA1.3 R2.1 R5.2 | length 3.9
  Bottom Layer w0.4: R2.1 105.815,114.575 DA1.3
NetDA1_5: DA1.5 R8.1 R11.2 | length 5.3
  Bottom Layer w0.6: R11.2 111.027,118.325 111.413,117.939 ; DA1.5 111.413,117.939 ; R8.1 111.425,117.951 111.413,117.939
NetDA1_6: DA1.6 R9.1 R12.2 | length 12
  Bottom Layer w0.6: DA1.6 114.79,114.565 117.6,117.375 R9.1 R12.2
NetDA1_7: DA1.7 R10.1 VT2.1 | length 45.6
  Bottom Layer w0.4: DA1.7 114.93,113.295 115.275,112.95 R10.1 156.888,112.95 VT2.1
NetDD1_1: DD1.1 DD2.1 FU3.2 R16.1 | length 85.7
  Top Layer w0.4: v1(73.525,71.15) v1(79.05,71.15) ; v1(82.15,71.15) 88.275,71.15 88.95,70.475 88.95,69.625 89.925,68.65 v1(89.975,68.7) ; v1(96.375,67.175) 96.7,67.5 107.8,67.5 v1(109.225,68.925)
  Bottom Layer w0.4: R16.1 73.225,70.85 v1(73.525,71.15) 74.003,71.628 DD2.1 ; v1(79.05,71.15) v1(82.15,71.15) ; v1(89.975,68.7) 91.175,67.5 96.05,67.5 v1(96.375,67.175) ; v1(109.225,68.925) 112.309,72.009 DD1.1
  Bottom Layer w0.5: FU3.2 57.4,58.25 59.075,59.925 59.075,62.775 64.675,68.375 76.275,68.375 v1(79.05,71.15)
NetDD1_2: DD1.2 DD2.2 FU1.2 R15.1 | length 94.4
  Top Layer w0.4: v1(59.575,59.1) 59.575,61.6 v1(60.775,62.8) ; v1(76.8,70.309) 78.941,70.309 v1(79.2,70.05) ; v1(82.128,72.378) 88.822,72.378 90.125,71.075 v1(90.125,70.025) ; v1(97.2,68.325) 107.025,68.325 v1(107.9,69.2)
  Bottom Layer w0.4: FU1.2 58.625,50.7 59.525,51.6 ; 59.575,51.6 v1(59.575,59.1) ; v1(60.775,62.8) 65.225,67.25 76.4,67.25 v1(79.2,70.05) ; R15.1 69.775,70.15 70.3,69.625 76.075,69.625 77.925,71.475 77.925,72.05 77.597,72.378 ; DD2.2 77.597,72.378 ; v1(82.128,72.378) 77.597,72.378 ; v1(90.125,70.025) 91.825,68.325 v1(97.2,68.325) ; v1(107.9,69.2) 111.459,72.759 DD1.2
NetDD1_3: DD1.3 DD2.3 | length 43.7
  Top Layer w0.4: v1(81.95,73.625) 93.925,73.625 96.075,75.775 103.686,75.775 104.186,76.275 106.475,76.275 v1(107.475,75.275)
  Bottom Layer w0.4: DD2.3 81.453,73.128 v1(81.95,73.625) ; v1(107.475,75.275) 109.25,73.5 ; 109.259,73.509 DD1.3
NetDD1_4: DD1.4 DD2.4 | length 48.6
  Top Layer w0.4: v1(82.2,74.9) 82.775,74.325 93.635,74.325 95.785,76.475 103.396,76.475 103.896,76.975 107.45,76.975 v1(107.65,76.775) ; v1(110.375,74.5) 110.616,74.259 v1(119.459,74.259)
  Bottom Layer w0.4: DD2.4 80.753,73.878 81.775,74.9 v1(82.2,74.9) ; v1(107.65,76.775) 108.1,76.775 v1(110.375,74.5) ; DD1.4 v1(119.459,74.259)
NetDD1_6: DD1.6 R17.2 | length 4.8
  Bottom Layer w0.4: R17.2 114.676,78.074 115.135,77.615 115.135,76.44 115.816,75.759 DD1.6
NetDD2_6: DD2.6 R18.2 | length 3.8
  Bottom Layer w0.4: R18.2 73.45,76.35 74.422,75.378 DD2.6
NetFU1_1: FU1.1 XP3.2 XP4.2 XP5.2 | length 82.8
  Top Layer w0.5: XP4.2 49.375,48.744 ; v1(49.85,49.575) 49.85,49.219 49.375,48.744 ; XP5.2 96.544,49.45 v2(98.825,49.45) ; v2(101.225,47.05) 100.379,47.896 100.229,47.896 ; XP3.2 104.95,52.617 100.229,47.896 ; 49.375,48.744 52.75,45.369 97.702,45.369 100.229,47.896
  Bottom Layer w0.5: v1(49.85,49.575) 52.125,49.575 53.25,50.7 FU1.1 ; v2(98.825,49.45) v2(101.225,47.05)
NetFU3_1: FU3.1 XP3.4 XP4.4 XP5.4 | length 80.8
  Top Layer w0.5: XP4.4 49.531,55.619 50.925,54.225 ; v1(52.475,54.25) 52.45,54.225 50.925,54.225 ; XP5.4 XP3.4 102.825,53.494 102.825,51.623 100.352,49.15 100.35,49.15 97.369,46.169 53.081,46.169 50.925,48.325 50.925,54.225
  Bottom Layer w0.5: v1(52.475,54.25) 52.675,54.05 FU3.1
NetR1_1: R1.1 VT1.3 | length 2.2
  Bottom Layer w0.4: R1.1@51.516,108.484 R1.1
  Bottom Layer w0.6: VT1.3 51.525,110.667 R1.1
NetR7_1: R7.1 VT2.3 | length 2.2
  Bottom Layer w0.6: VT2.3 157.916,108.484 R7.1
NetR13_2: R13.2 VD2.1 | length 4.2
  Bottom Layer w0.5: R13.2 VD2.1
NetR14_1: R14.1 VD2.4 | length 4
  Bottom Layer w0.5: VD2.4 175.03,100.405 176.425,101.8 R14.1
VIN: R13.1 R14.2 VD1.1 XP3.3 XP4.3 XP5.3 | length 280.7
  Top Layer w0.5: v2(102.325,45.825) 102.4,45.75 102.4,44.319 ; 110.8,46.825 111,46.825
  Top Layer w1: XP4.3 42.5,46.325 44.506,44.319 102.4,44.319 108.294,44.319 110.8,46.825 111.825,47.85 111.825,54.2 ; v2(48.2,58.025) 48.825,58.025 50.25,56.6 53.95,56.6 55.75,58.4 55.75,61.6 v2(59.55,65.4) ; XP3.3 110.406,55.619 111.825,54.2 ; v2(176.475,65.55) 176.475,62.75 167.925,54.2 111.825,54.2
  Bottom Layer w0.5: R13.1 27.95,60.1 35.431,52.619 XP4.3 ; XP5.3 92.219,50.775 96.1,50.775 101.05,45.825 v2(102.325,45.825) ; 179.024,95.076 R14.2
  Bottom Layer w1: XP4.3 40.6,54.519 40.6,56.275 42.35,58.025 v2(48.2,58.025) ; v2(59.55,65.4) 62.774,68.624 VD1.1 ; v2(176.475,65.55) 188.275,77.35 188.275,85.825 179.024,95.076
pads on no net: DD1.14 DD1.15 DD1.16 DD1.26 DD1.27 DD1.28 DD1.29 DD1.30 DD1.31 DD1.32 DD1.33 DD1.34 DD1.35 DD1.36 DD1.37 DD1.38 DD1.39 DD1.40 DD1.41 DD1.42 DD1.43 DD1.44 DD1.45 DD1.46 DD1.47 DD1.48 DD1.49 DD1.50 DD1.51 DD1.52 DD1.53 DD1.54 DD1.55 DD1.56 DD2.14 DD2.15 DD2.16 IND1.12 IND1.13 IND1.14 IND1.15 IND1.17 IND1.21 IND1.22 IND1.23 IND1.25 IND1.29 IND1.30 IND1.45 IND1.47 IND1.48 IND1.49 IND1.53 IND1.54 IND1.56 IND1.57 REP1.1 REP2.1 XP3.5 XP4.7 XP5.7

## Polygon pours and split planes (outlines as drawn)
GND on Top Layer "GND_L01_P000" (hatched 90Degree grid 0.15 track 0.2, remove dead copper, pour order 0): 17.1,123.319 189.6,123.319 189.6,43.419 17.1,43.419
GND on Bottom Layer "GND_L02_P002" (hatched 90Degree grid 0.15 track 0.2, remove dead copper, pour order 2): 17.1,123.319 189.6,123.319 189.6,43.419 17.1,43.419

## Keep-outs
Keep-Out Layer:
  the board outline again, w0.2

## Other copper
Top Layer:
  pour cut-out: 113.45,118.75 113.45,123.319 122.45,123.319 122.45,118.75
  pour cut-out: 96.5,118.75 96.5,123.319 105.5,123.319 105.5,118.75
Bottom Layer:
  pour cut-out: 96.5,118.75 96.5,123.319 105.5,123.319 105.5,118.75
  pour cut-out: 113.45,118.75 113.45,123.319 122.45,123.319 122.45,118.75
  pour cut-out: 55.175,51.95 56.425,51.95 56.425,49.45 55.175,49.45
  pour cut-out: 55.175,55.325 56.425,55.325 56.425,52.825 55.175,52.825

## Silkscreen, mask and mechanical layers (free items; w line width, h text height)
Top Overlay:
  lines w0.5: 24.613,87.112 29.6,82.125 ; 27.275,82.125 29.6,82.125 ; 29.6,84.45 29.6,82.125
  text "DE LP-502-W" at 91.8,97.7 h2
  text "LCD KEY" at 18.05,90.575 h1.8
  text "BULB" at 20.15,88.175 h1.8
Bottom Overlay:
  lines w0.2: 177.959,83.45 177.959,96.775 188,96.775 188,83.45 ; 178,86.75 188,86.75 ; 178.325,96.8 178.325,98.475 180.4,98.475 180.4,96.8
  text "NTC 10k" at 103.85,121.8 h1
  text "NTC 10k" at 121.15,121.8 h1
  text "CONTRAST" at 186.75,78.25 h1
  text "ADJASTMENT" at 187.675,76.5 h1
  text "LCD Controller hv2" at 147.425,55.65 h2
  text "KEYBOARD I2C" at 86.625,50.925 h1
  text "SYMBOL LCD DISPLAY" at 129.25,50.925 h1
  text "7-SEG INDICATOR" at 66.6,44.05 h1

## Dimensions
34.743,61.144 to 17.1,43.419 on Mechanical 2
34.743,61.144 to 34.743,105.734 on Mechanical 2
34.743,61.144 to 171.918,61.144 on Mechanical 2
181.95,115.644 to 181.95,51.054 on Mechanical 2
24.765,115.644 to 181.95,115.644 on Mechanical 2
189.6,123.319 to 189.6,43.419 on Mechanical 2
17.1,123.319 to 189.6,123.319 on Mechanical 2

## Text inside footprints (layer, text, board x,y; h text height)
IND1: Top Overlay "70" at 58.243,107.059 h0.8; Top Overlay "36" at 149.368,107.059 h0.8; Top Overlay "35" at 149.443,58.834 h0.8; Top Overlay "1" at 59.543,58.884 h0.8
R1: Bottom Overlay "10W" at 49.525,77.725 h4 r270
R7: Bottom Overlay "10W" at 155.925,77.725 h4 r270
VD2: Top Overlay "A2" at 169.306,99.45 h0.8; Top Overlay "K2" at 169.306,65.7 h0.8; Top Overlay "K1" at 31.675,98.25 h0.8; Top Overlay "A1" at 31.6,64.425 h0.8